# Altium PCB LDP_DS_V2.0.PcbDoc
Units mil, origin at the board's own origin, x right, y up, seen from the top; angles counter-clockwise.
Board outline 6000 x 4000 mil, 2 copper layers (Top Layer, Bottom Layer); 20 components, 19 nets, 88 pads, 10 vias.
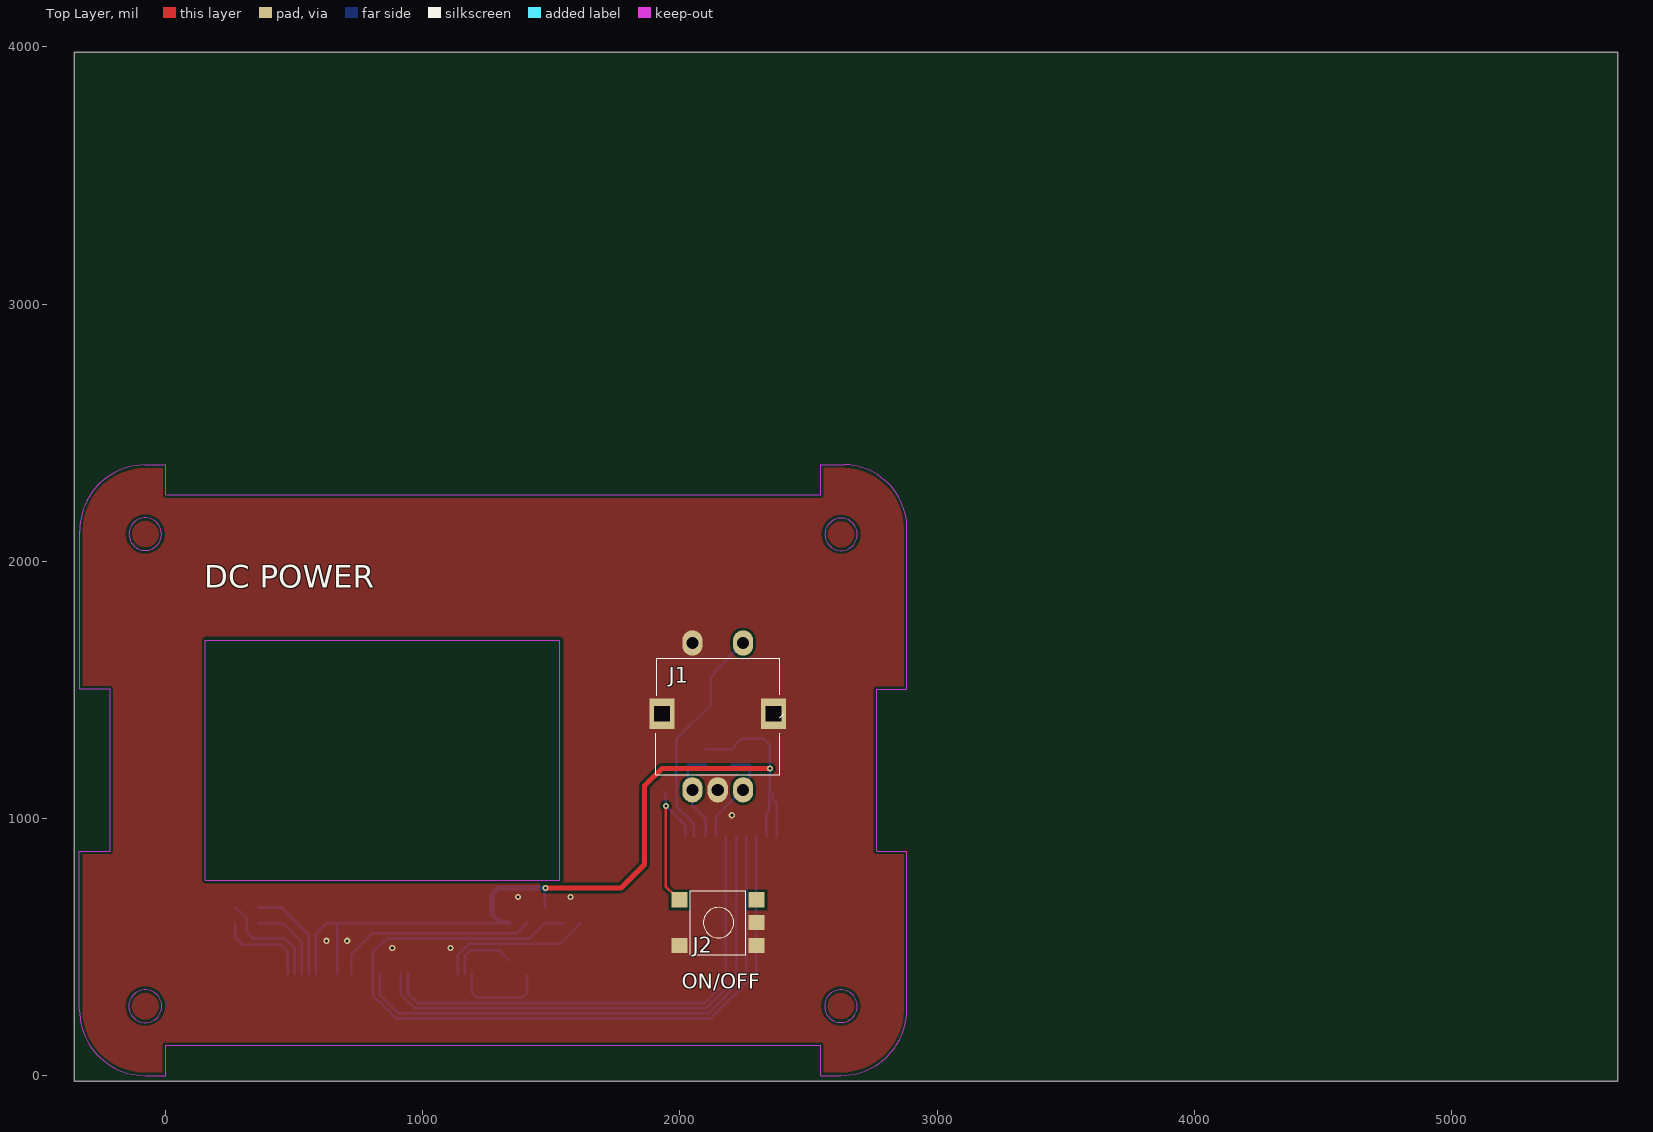
[diagram p0: Top Layer view]
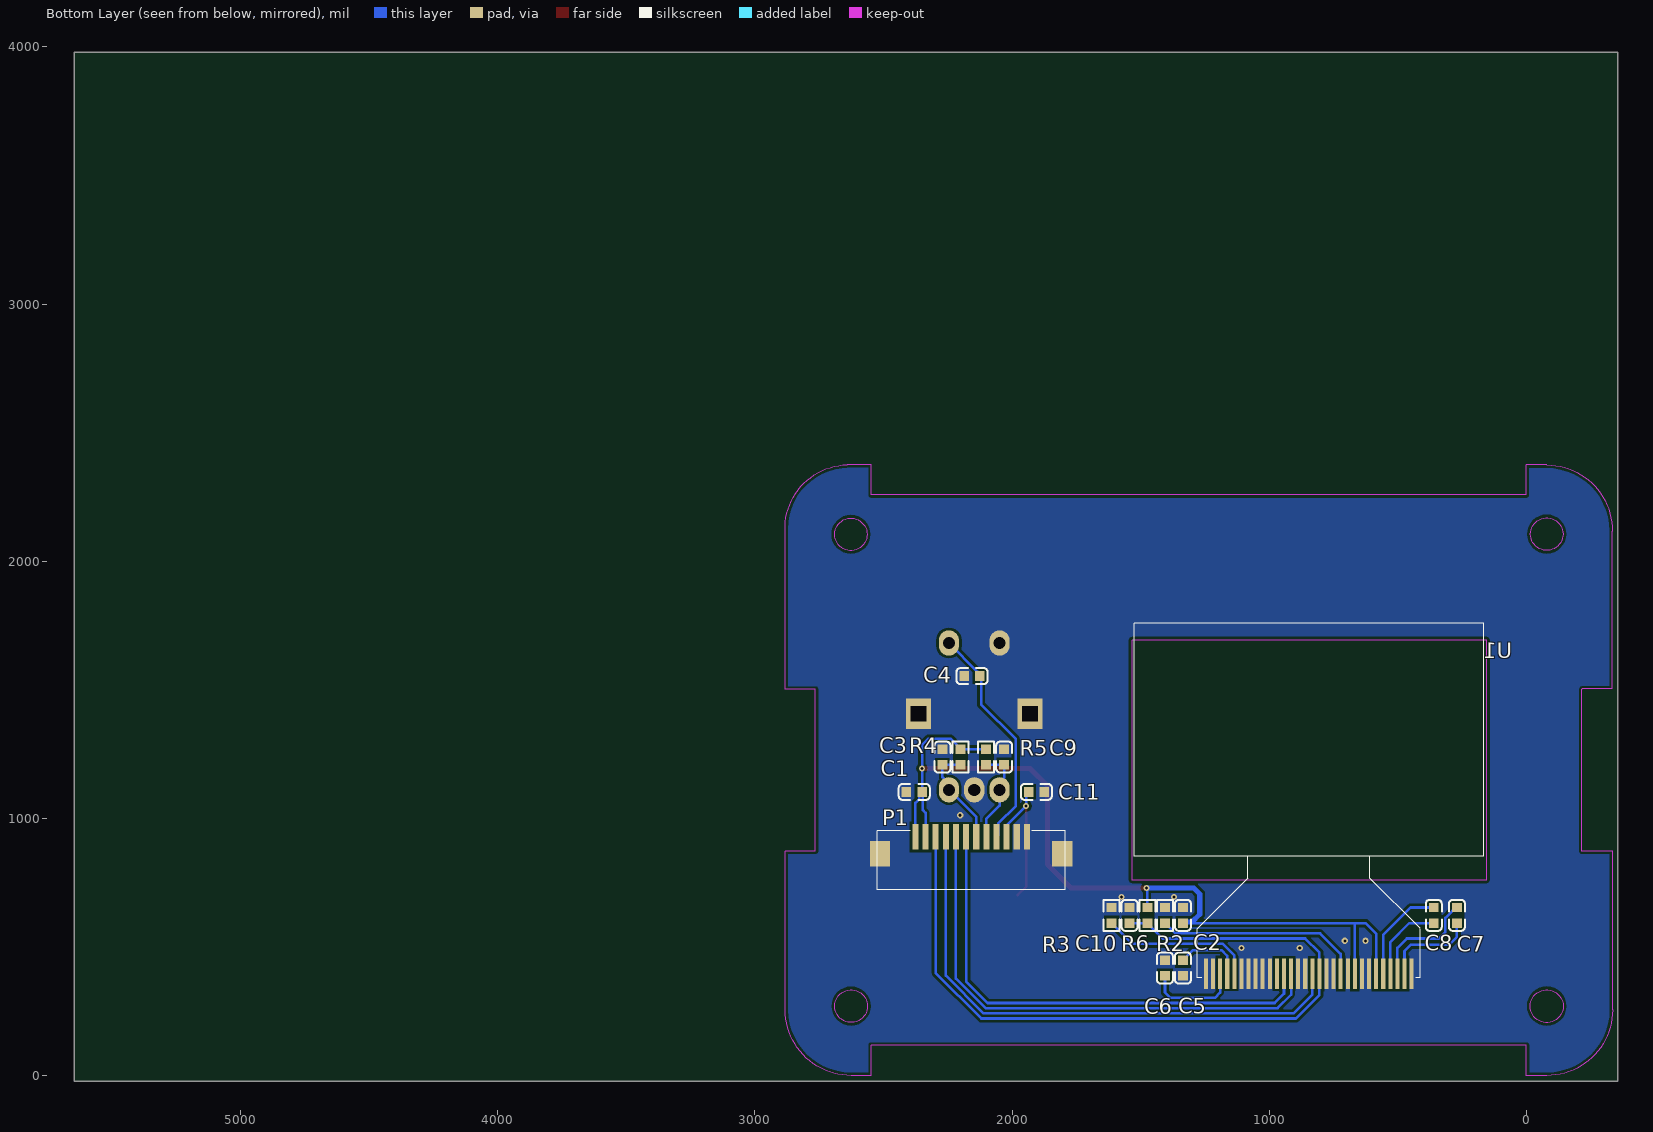
[diagram p1: Bottom Layer view, seen from below]
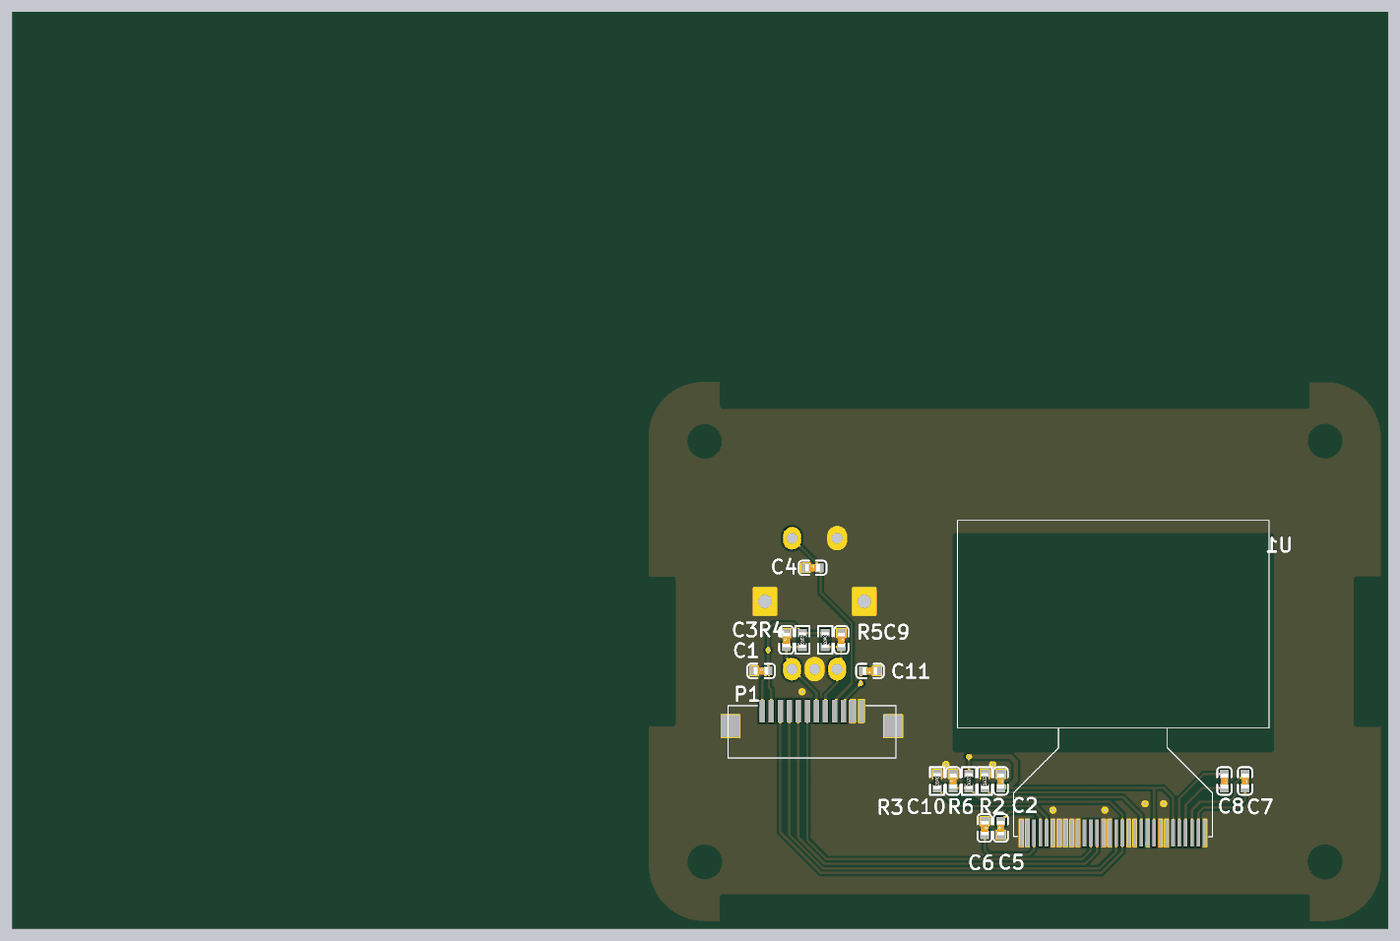
[diagram p2: 3D render of the assembled board from below, using the file's embedded part models]

## Layer stack, top to bottom
Top Solder: solder mask 0.4, Solder Resist, Dk 3.5
Top Layer: signal copper 1.4
Dielectric 1: dielectric 12.6, FR-4, Dk 4.8
Bottom Layer: signal copper 1.4
Bottom Solder: solder mask 0.4, Solder Resist, Dk 3.5

## Board outline
-354,-21 5646,-21 5646,3979 -354,3979

## Design rules (kind name [scope] priority, off if disabled: settings)
Clearance [All] p1: gap=10 ignorepadtopadclearanceinfootprint=FALSE except(0: Arc-Hole Track-Hole SMDPad-Hole THPad-Hole Via-Hole Fill-Hole Poly-Hole Region-Hole Text-Hole)
PlaneConnect [All] p1: planeconnectstyle=Direct reliefexpansion=20 reliefentries=4 reliefconductorwidth=10 reliefairgap=10
PolygonConnect [All] p1: connectstyle=Direct reliefconductorwidth=10 reliefentries=4 polygonreliefangle="90 Angle" airgapwidth=10
RoutingVias [All] p1: holewidth=28 width=50 viastyle="Through Hole" minholewidth=28 minwidth=50 maxholewidth=28 maxwidth=50
SolderMaskExpansion [All] p1: expansion=4
Width [All] p1: maxlimit=20 minlimit=10 preferedwidth=10 minimp=50.000000 maximp=50.000000 favimp=50.000000
29 further rules are at their usual default settings.

## Components (designator, comment, footprint, x,y, rotation, side; value= is the part's Value field where it differs from the comment)
C1 "100nF (104) 10% 50V" 0603_C 2380.68,1104 r180 bottom
C2 "1uF (105) 10% 50V" 0603_C 1336,624 r270 bottom
C3 "10nF (103) 10% 50V" 0603_C 2271,1239 r90 bottom
C4 "100nF (104) 10% 50V" 0603_C 2156,1554 r180 bottom
C5 "1uF (105) 10% 50V" 0603_C 1336,419 r90 bottom
C6 "1uF (105) 10% 50V" 0603_C 1406,419 r270 bottom
C7 "1uF (105) 10% 50V" 0603_C 271,624 r270 bottom
C8 "1uF (105) 10% 50V" 0603_C 361,624 r270 bottom
C9 "10nF (103) 10% 50V" 0603_C 2031,1239 r270 bottom
C10 "100nF (104) 10% 50V" 0603_C 1543.86,624 r90 bottom
C11 "100nF (104) 10% 50V" 0603_C 1906,1104 r0 bottom
J1 "EC11_DIP" EC11_DIP 2049.04,1111.72 r90 top locked
J2 "SW 6x6" "SW 6x6" 1998.79,684.17 r0 top locked
P1 "FPC12" FPC_12 1942.93,929 r270 bottom locked
R2 "1KΩ (1001) ±1%" 0603_R 1405.29,624 r90 bottom
R3 "560KΩ (5603) ±1%" 0603_R 1613.14,624 r270 bottom
R4 "10KΩ (1002) ±1%" 0603_R 2201,1239 r90 bottom
R5 "10KΩ (1002) ±1%" 0603_R 2101,1239 r270 bottom
R6 "1KΩ (1001) ±1%" 0603_R 1474.57,624 r90 bottom
U1 "1.3寸OLED" 1.3寸OLED 447.29,397 r0 bottom locked

## Footprints (in the part's own frame and the unit in brackets; to place one, negate y for a bottom-side part, rotate by r counter-clockwise, add the part's x,y. Pads: shape width x height; smd on the part's side, far side on the other; paste and mask are expansions set on the pad)
1.3寸OLED [mm]
  rect 0.4x3 smd: 1(0,0) 2(0.7,0) 3(1.4,0) 4(2.1,0) 5(2.8,0) 6(3.5,0) 7(4.2,0) 8(4.9,0) 9(5.6,0) 10(6.3,0) 11(7,0) 12(7.7,0) 13(8.4,0) 14(9.1,0) 15(9.8,0) 16(10.5,0) 17(11.2,0) 18(11.9,0) 19(12.6,0) 20(13.3,0) 21(14,0) 22(14.7,0) 23(15.4,0) 24(16.1,0) 25(16.8,0) 26(17.5,0) 27(18.2,0) 28(18.9,0) 29(19.6,0) 30(20.3,0)
  silkscreen extent -7.14,-34.62 27.36,0.42
0603_C [mm]
  rect 0.93x0.98 smd: 1(-0.77,0) 2(0.77,0)
  silkscreen extent -1.53,-0.79 1.54,0.79, body extent -0.8,-0.4 0.8,0.4, height 0.3
0603_R [mm]
  rect 0.93x0.98 smd: 1(-0.77,0) 2(0.77,0)
  silkscreen extent -1.53,-0.79 1.54,0.79, body extent -0.85,-0.4 0.85,0.4, height 0.56
EC11_DIP [mm]
  oval 2.5x2 hole 1.2: 1(0,0) 2(0,-2.5) 3(0,-5) 4(14.5,-5) 5(14.5,0)
  rect 3x2.5 hole 1.5 square: 6(7.5,3) 7(7.5,-8)
  silkscreen extent 1.5,-9 13,3.6
FPC_12 [mm]
  rect 2.5x0.6 smd: 1(0,0) 2(0,-1) 3(0,-2) 4(0,-3) 5(0,-4) 6(0,-5) 7(0,-6) 8(0,-7) 9(0,-8) 10(0,-9) 11(0,-10) 12(0,-11)
  rect 2.5x2 smd: 13(1.676,3.5) 14(1.676,-14.5)
  silkscreen extent -0.61,-14.78 5.21,3.81
"SW 6x6" [mm]
  rect 1.6x1.5 smd: 1(0,0) 2(0,-4.5) 3(7.6,-4.5) 4(7.6,0) 5(7.6,-2.25)
  silkscreen extent 1.05,-5.4 6.55,0.9

## Part data
C1 C4 C10 C11: library part "0603 100nF (104) 10% 50V", "贴片电容", Package=0603, SuppliersPartNumber=C14663, ComponentLink1Description=供应商, ComponentLink1URL=http://www.szlcsc.com/product/details_15331.html, Supplier=LC
C2 C5 C6 C7 C8: library part "0603 1uF (105) 10% 50V", "贴片电容", Package=0603, SuppliersPartNumber=C15849, ComponentLink1Description=供应商, ComponentLink1URL=http://www.szlcsc.com/product/details_16531.html, Supplier=LC
C3 C9: library part "0603 10nF (103) 10% 50V", "贴片电容", Package=0603, SuppliersPartNumber=C57112, ComponentLink1Description=供应商, ComponentLink1URL=http://www.szlcsc.com/product/details_58143.html, Supplier=LC
P1: library part "Header 12", "Header, 12-Pin", LatestRevisionDate=17-Jul-2002, LatestRevisionNote="Re-released for DXP Platform.", Publisher="Altium Limited"
R2 R6: library part "0603 1KΩ (1001) 1%", "贴片电阻", Package=0603, SuppliersPartNumber=C21190, ComponentLink1Description=供应商, ComponentLink1URL=http://www.szlcsc.com/product/details_21904.html, Supplier=LC
R3: library part "0603 560KΩ (5603) 1%", "贴片电阻", Package=0603, SuppliersPartNumber=C23203, ComponentLink1Description=供应商, ComponentLink1URL=http://www.szlcsc.com/product/details_23930.html, Supplier=LC
R4 R5: library part "0603 10KΩ (1002) 1%", "贴片电阻", Package=0603, SuppliersPartNumber=C25804, ComponentLink1Description=供应商, ComponentLink1URL=http://www.szlcsc.com/product/details_26547.html, Supplier=LC

## Via types
v1: diameter 23.62, hole 11.81, Top Layer to Bottom Layer, 10 vias

## Nets (pads, with @x,y where several pads share a name; then routed paths per layer and width w, separated by ;. In a path a pad name is that pad's centre, name@x,y a point inside that pad or via, vN(x,y) a via of type N, cw(c..) or ccw(c..) an arc to the next point about the centre after c; other vN are vias at no path point)
BTN_ON: C11.2 J2.1 P1.3 | length 570.3
  Top Layer w10: v1(1946,1049) 1946,734.98 J2.1@1978.49,702.49
  Bottom Layer w10: C11.2 1946,1094.32 v1(1946,1049) 2021.67,973.33 P1.3
D/C: P1.9 U1.15 | length 2136.5
  Bottom Layer w10: U1.15 833.12,315.88 906,243 2111.72,243 2257.89,389.17 P1.9
EC11_A: C3.1 J1.3 P1.6 R4.1 | length 405.3
  Bottom Layer w10: P1.6 2139.78,1007.78 2243.72,1111.72 J1.3 2245.89,1136.68 2271,1161.79 C3.1 R4.1
EC11_B: C9.2 J1.1 P1.5 R5.2 | length 378.4
  Bottom Layer w10: P1.5 2100.41,999.59 2049.04,1050.96 J1.1 2049.04,1140.17 2031,1158.21 C9.2 R5.2
EC11_BTN: C4.2 J1.4 P1.4 | length 892.8
  Bottom Layer w10: P1.4 2054.23,935.81 2054.23,980.77 1986,1049 1986,1309 2121,1444 C4.2@2121,1549.32 ; C4.2@2120.68,1549 C4.2@2121,1549.32 ; J1.4 2133.99,1570.69 2133.99,1562.31 C4.2@2121,1549.32
GND: C1.1 C2.1 C3.2 C4.1 C5.1 C6.1 C9.1 C10.2 C11.1 J1.2 J1.5 J1.6 J1.7 J2.2 J2.3 J2.5 P1.1 P1.2 P1.13 P1.14 R2.2 R3.1 U1.1 U1.7 U1.8 U1.10 U1.12 U1.13 U1.16 U1.17 U1.21 U1.22 U1.23 U1.24 U1.25 U1.29 U1.30
  other v1: 882,497 1108,497 626,525 707,525 1371,696 1575,696 2202,1013
LCD_RST: C10.1 P1.10 R6.1 U1.14 | length 3082.4
  Bottom Layer w10: C10.1 R6.1 1473.59,593.69 1460.28,580.38 1460.28,579.39 1414.89,534 861,534 805.56,478.56 U1.14 805.56,314.44 897,223 2120,223 2297.26,400.26 P1.10
MOSI: P1.7 U1.19 | length 1925.1
  Bottom Layer w10: U1.19 943.35,319.65 980,283 2095.15,283 2179.15,367 P1.7
NetC5_2: C5.2 U1.27 | length 268
  Bottom Layer w10: U1.27 1163.83,466.54 1186.28,489 1296.32,489 1321.71,463.61 1321.71,462.62 1335.02,449.32 C5.2
NetC6_2: C6.2 U1.28 | length 369.9
  Bottom Layer w10: U1.28 1191.39,323.61 1212,303 1385,303 1406,324 C6.2
NetC7_1: C7.1 U1.3 | length 429.1
  Bottom Layer w10: C7.1 284.31,641.01 288.99,641.01 316,614 316,559 341,534 466,534 502.41,497.59 U1.3
NetC7_2: C7.2 U1.2 | length 369
  Bottom Layer w10: C7.2 271,539 301,509 451,509 474.85,485.15 U1.2
NetC8_1: C8.1 U1.5 | length 391.3
  Bottom Layer w10: C8.1 450.68,654.32 557.53,547.47 U1.5
NetC8_2: C8.2 U1.4 | length 322.5
  Bottom Layer w10: C8.2 456.32,593.68 529.97,520.03 U1.4
NetC11_1: 
NetR2_1: R2.1 U1.11 | length 809.5
  Bottom Layer w10: U1.11 722.88,473.88 803,554 1365.6,554 1390.99,579.39 1390.99,580.38 1404.3,593.69 R2.1
NetR3_2: R3.2 U1.26 | length 600.1
  Bottom Layer w10: U1.26 1136.27,467.27 1183,514 1533.46,514 1598.85,579.39 1598.85,580.38 1612.16,593.69 R3.2
SCK: P1.8 U1.18 | length 2004.7
  Bottom Layer w10: U1.18 915.8,315.2 968,263 2103.43,263 2218.52,378.09 P1.8
VCC3V3: C1.2 C2.2 P1.11 P1.12 R4.2 R5.1 R6.2 U1.6 U1.9 | length 3644.3
  Top Layer w20: v1(1477,730) 1771,730 1863,822 1863,1127.63 1930.18,1194.82 v1(2350.37,1194.82)
  Bottom Layer w10: U1.6 585.09,553.09 625.69,593.69 670.69,593.69 ; U1.9 667.76,590.76 670.69,593.69 ; C2.2 670.69,593.69 ; R6.2 1474.57,727.57 v1(1477,730) ; R5.1 R4.2 2201.98,1269.32 2215.29,1282.62 2215.29,1286.29 2240,1311 2325,1311 2350.37,1285.63 v1(2350.37,1194.82) C1.2 ; P1.11 2336.63,1022.63 2347,1033 2347,1100.63 C1.2 ; P1.12 2376,1061 2361.09,1075.91 2361.09,1093.28 C1.2
  Bottom Layer w20: C2.2 1331.33,598.36 1300.64,598.36 1271,628 1271,707 1294,730 v1(1477,730)
pads on no net: J2.4 U1.20

## Polygon pours and split planes (outlines as drawn)
GND on Bottom Layer "Bottom Layer-GND" (solid, remove dead copper, pour order 0): 2,2258 3,2259 2548,2259 2548,2376 2550,2378 2740,2378 2883,2235 2883,1503 2765,1503 2765,874 2882,874 2882,152 2730,0 2729,1 2548,1 2548,119 1,119 1,1 0,2 -192,2 -334,144 -334,873 -215,873 -216,874 -216,1504 -333,1504 -332,1505 -332,2243 -199,2376 -198,2375 2,2375
GND on Top Layer "Top Layer-GND" (solid, pour order 2): 2,2375 2,2258 2547,2258 2548,2259 2548,2376 2739,2376 2883,2232 2883,1503 2765,1503 2765,874 2882,874 2879,871 2879,139 2740,0 2739,1 2548,1 2548,119 2540,127 -4,127 -4,6 1,1 0,0 -188,0 -338,150 -334,154 -334,873 -215,873 -216,874 -216,1504 -333,1504 -332,1505 -332,2232 -189,2375

## Keep-outs
Keep-Out Layer:
  circle w3.94: c2626,271 r63.53
  circle w3.94: c-78,271 r63.95
  circle w3.94: c-78,2106 r63.41
  circle w3.94: c2627,2105 r63.03
  lines w3.94: -334,257 ccw(c-78.5,256.5) -79,1 1,1 1,119 2548,119 2548,1 2625,1 ccw(c2626,257) 2882,256 2882,874 2765,874 2765,1503 2883,1503 2883,2119 ccw(c2633.5,2126.5) 2641,2376 2548,2376 2548,2259 2547,2258 2,2258 2,2375 -78,2375 ccw(c-77,2119) -333,2118 -333,1504 -216,1504 -215,1503 -215,873 -334,873 -334,257 ; 156.05,760.93 156.05,1694 1534,1694 1534,760.93 156.05,760.93

## Other copper
Top Layer:
  pour cut-out: 156.05,1694 1534,1694 1534,760.93 156.05,760.93
Bottom Layer:
  pour cut-out: 156.05,1694 1534,1694 1534,760.93 156.05,760.93

## Silkscreen, mask and mechanical layers (free items; w line width, h text height)
Top Overlay:
  text "DC POWER" at 152,1868 h150
  text "ON/OFF" at 2008,319 h100